# Altium PCB CC2530.PcbDoc
Units mil, origin at the board's own origin, x right, y up, seen from the top; angles counter-clockwise.
Board outline 2950 x 1725 mil, 2 copper layers (Top Layer, Bottom Layer); 28 components, 27 nets, 119 pads, 13 vias.
Unrouted connection lines stored in the file: 1.
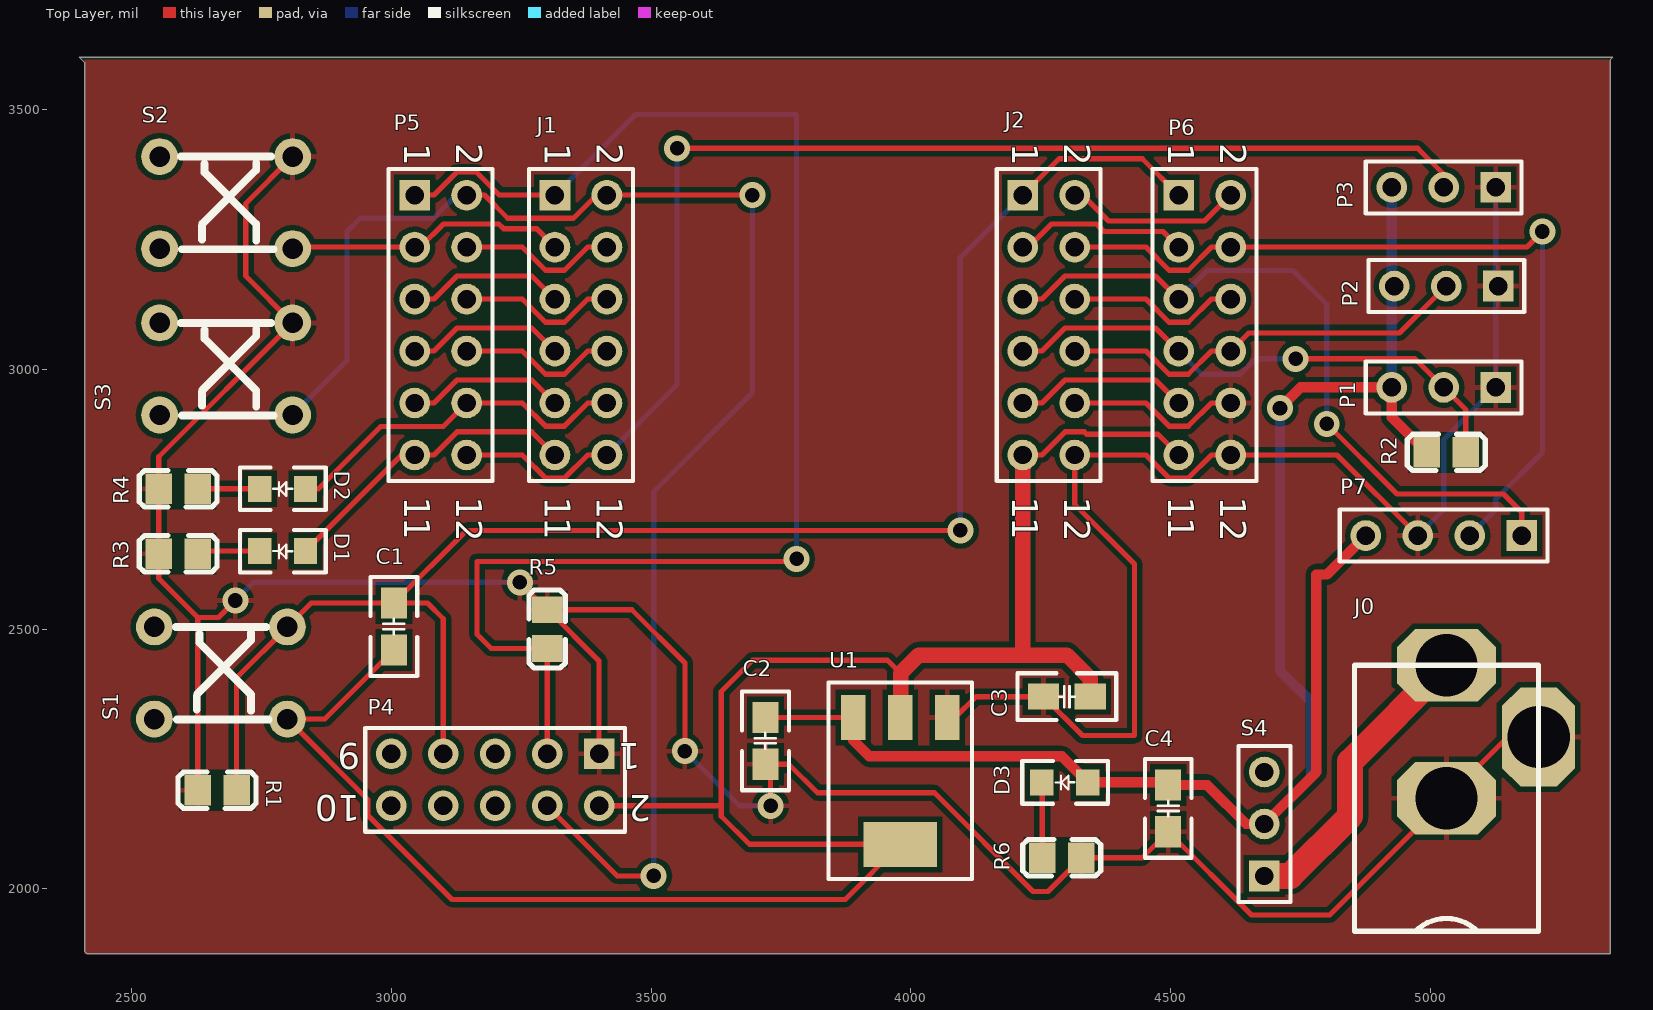
[diagram p0: Top Layer view]
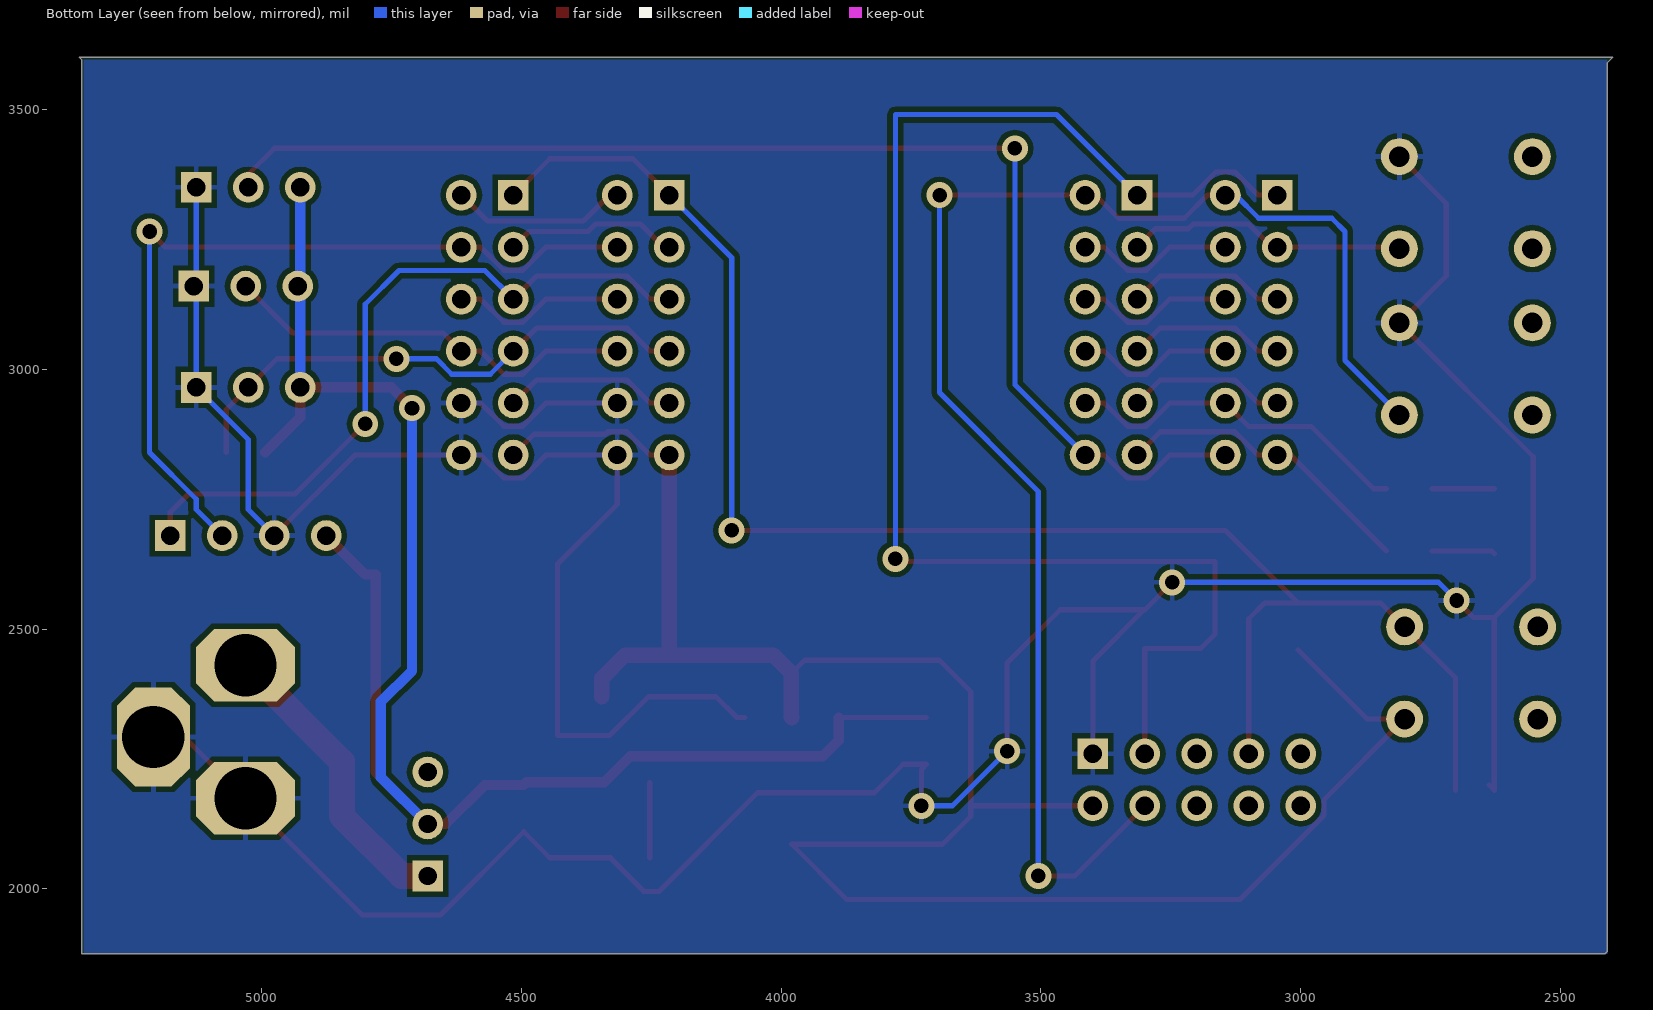
[diagram p1: Bottom Layer view, seen from below]

## Layer stack, top to bottom
Top Layer: signal copper 1.4
Dielectric: dielectric 12.6, FR-4, Dk 4.8
Bottom Layer: signal copper 1.4

## Board outline
2410,3590 2410,1880 2415,1875 5345,1875 5345,3595 5350,3600 2405,3600 2400,3600

## Design rules (kind name [scope] priority, off if disabled: settings)
Clearance [All] p1: gap=10
PolygonConnect [All] p1: connectstyle=Relief reliefconductorwidth=10 reliefentries=4 polygonreliefangle="90 Angle"
RoutingVias [All] p1: holewidth=28 width=50 viastyle="Through Hole" minholewidth=28 minwidth=50 maxholewidth=28 maxwidth=50
SilkscreenOverComponentPads [All] p1: minsilkscreentomaskgap=10
SolderMaskExpansion [All] p1: expansion=4
Width [All] p1: maxlimit=100 minlimit=10 preferedwidth=10
27 further rules are at their usual default settings.

## Components (designator, comment, footprint, x,y, rotation, side; value= is the part's Value field where it differs from the comment)
C1 "Cap" 0805C 3005,2505 r270 top
C2 "Cap" 0805C 3720,2285 r90 top
C3 "Cap" 0805C 4300,2370 r0 top
C4 "Cap" 0805C 4495,2155 r90 top
D1 "LED2" 0805D 2835,2650 r180 top
D2 "LED2" 0805D 2835,2770 r180 top
D3 "LED2" 0805D 4340,2205 r180 top
J0 "POWER_PLUG" POWC 5030,2430 r0 top
J1 "HEARD1" HDR2X6 3315,3335 r270 top
J2 "HEARD2" HDR2X6 4215,3335 r270 top
P1 "18B20" HDR1X3 5125,2965 r180 top
P2 "VOICE READ" HDR1X3 5130,3160 r180 top
P3 "Pyroelectric" HDR1X3 5125,3350 r180 top
P4 "Programming" HDR2X5 3400,2260 r180 top
P5 "HEARD1" HDR2X6 3045,3335 r270 top
P6 "HEARD2" HDR2X6 4515,3335 r270 top
P7 "USB" HDR1X4 5175,2680 r180 top
R1 "Res2" 0805 2665,2190 r0 top
R2 "Res2" 0805 5030,2840 r180 top
R3 "es2" 0805 2590,2645 r0 top
R4 "es2" 0805 2590,2770 r0 top
R5 "Res2" 0805 3300,2500 r90 top
R6 "Res2" 0805 4290,2060 r180 top
S1 "SW-PB" SW-PUSH 2800,2505 r180 top
S2 "SW-PB" SW-PUSH 2810,3410 r180 top
S3 "SW-PB" SW-PUSH 2810,3090 r180 top
S4 "SW-SPST" HDR1X3 4680,2025 r90 top
U1 "AM1117-5v" SOT223 4070,2330 r180 top

## Footprints (in the part's own frame and the unit in brackets; to place one, negate y for a bottom-side part, rotate by r counter-clockwise, add the part's x,y. Pads: shape width x height; smd on the part's side, far side on the other; paste and mask are expansions set on the pad)
0805 [mm] "Chip Resistor; Body 2.0 x 1.3 mm"
  rect 1.3x1.5 smd: 1(-0.95,0) 2(0.95,0)
  silkscreen extent -1.91,-0.89 1.91,0.89
0805C [mil]
  rect 60x50 smd: 1(-45,0) 2(45,0)
  silkscreen extent -95,-45 95,45
0805D [mil]
  rect 45x50 smd: A(0,0) K(88,0)
  silkscreen extent -39,-41 126,41
HDR1X3 [mm] "Connector; Header; 3 Position"
  rect 1.5x1.5 hole 0.9: 1(0,0)
  round 1.5 hole 0.9: 2(2.54,0) 3(5.08,0)
  silkscreen extent -1.27,-1.27 6.35,1.27
HDR1X4 [mm] "Connector; Header; 4 Position"
  rect 1.5x1.5 hole 0.9: 1(0,0)
  round 1.5 hole 0.9: 2(2.54,0) 3(5.08,0) 4(7.62,0)
  silkscreen extent -1.27,-1.27 8.89,1.27
HDR2X5 [mm] "Connector; Header; 5x2 Position"
  rect 1.5x1.5 hole 0.9: 1(0,0)
  round 1.5 hole 0.9: 2(0,2.54) 3(2.54,0) 4(2.54,2.54) 5(5.08,0) 6(5.08,2.54) 7(7.62,0) 8(7.62,2.54) 9(10.16,0) 10(10.16,2.54)
  silkscreen extent -1.27,-1.27 11.43,3.81
HDR2X6 [mm] "Connector; Header; 6x2 Position"
  rect 1.5x1.5 hole 0.9: 1(0,0)
  round 1.5 hole 0.9: 2(0,2.54) 3(2.54,0) 4(2.54,2.54) 5(5.08,0) 6(5.08,2.54) 7(7.62,0) 8(7.62,2.54) 9(10.16,0) 10(10.16,2.54) 11(12.7,0) 12(12.7,2.54)
  silkscreen extent -1.27,-1.27 13.97,3.81
POWC [mil]
  oct 190x140 hole 120: 1(0.35,0.48) 2(0.35,-255.52)
  oct 140x190 hole 120: 3(177.55,-137.52)
  silkscreen extent -177,-512 178,0
SOT223 [mm]
  rect 1.2x2.2 smd: 1(0,0) 2(2.3,0) 3(4.6,0)
  rect 3.6x2.2 smd: 4(2.3,6.2)
  silkscreen extent -1.2,-1.7 5.8,7.9
SW-PUSH [mm]
  round 1.8 hole 1: 1(-0.004,0.022) 2(-0.004,4.522) 3(6.496,0.022) 4(6.496,4.522)
  silkscreen extent 0.92,0.02 5.45,4.55

## Part data
C1 C2 C3 C4: "Capacitor"
D1 D2 D3: "Typical RED, GREEN, YELLOW, AMBER"
J1 J2 P5 P6: library part MHDR2X6, "Header, 6-Pin, Dual row"
P1: library part "Header 3H", "Header, 3-Pin, Right Angle"
P2 P3: library part "Header 3", "Header, 3-Pin"
P4: library part "Header 5X2", "Header, 5-Pin, Dual row"
P7: library part "Header 4", "Header, 4-Pin"
R1 R2 R5 R6: "Resistor"
R3 R4: library part Res2, "Resistor"
S4: "Single-Pole, Single-Throw Switch"

## Via types
v1: diameter 50, hole 28, Top Layer to Bottom Layer, 13 vias

## Nets (pads, with @x,y where several pads share a name; then routed paths per layer and width w, separated by ;. In a path a pad name is that pad's centre, name@x,y a point inside that pad or via, vN(x,y) a via of type N, cw(c..) or ccw(c..) an arc to the next point about the centre after c; other vN are vias at no path point)
GND: C2.1 C3.1 C4.1 J0.2 J0.3 J2.10 J2.12 P1.1 P2.1 P3.1 P4.1 P6.10 P6.12 P7.3 R1.1 R3.1 R4.1 R5.2 R6.1 S2.1 S3.1 U1.1 | length 7989.6
  Top Layer w10: R1.1@2637.4,2199.8 R1.1 2627.6,2522.4 ; v1(2700,2555) 2667.4,2522.4 2627.6,2522.4 ; S2.1 2720,3318.96 2720,3179.29 S3.1 2552.6,2831.56 R4.1 R3.1 2552.6,2597.4 2627.6,2522.4 ; v1(3247.4,2590) R5.2 R5.2@3301.53,2537.4 ; P4.1 3400,2438.93 R5.2@3301.53,2537.4 ; v1(3565,2265) 3565,2435 3462.6,2537.4 R5.2@3301.53,2537.4 ; v1(3730,2160) 3730,2230 C2.1 3765,2240 3820,2185 4045,2185 4235,1995 4263.93,1995 4327.4,2058.47 R6.1 4445,2060 C4.1 4655,1950 4805.87,1950 J0.2 5148.35,2292.48 J0.3 ; U1.1 4085,2330 4125,2370 C3.1 4330,2295 4430,2295 4430,2625 4315,2740 J2.12 4452.03,2835 4496.56,2790.47 4533.44,2790.47 4577.97,2835 P6.12 4820,2835 P7.3 ; J2.10 4452.03,2935 4496.56,2890.47 4533.44,2890.47 4577.97,2935 P6.10 ; J0.3@5178.35,2217.48 5237.55,2217.48 J0.3@5240.03,2215
  Bottom Layer w10: v1(2700,2555) 2735,2590 v1(3247.4,2590) ; v1(3565,2265) 3670,2160 v1(3730,2160) ; P7.3 5025,2730 5025,2865 P1.1 P3.1
NetD1_K: D1.K R3.2 | length 121.7
  Top Layer w10: R3.2 2632.4,2650 D1.K
NetD2_K: D2.K R4.2 | length 119.6
  Top Layer w10: R4.2 D2.K
NetD3_K: D3.K R6.2 | length 144.4
  Top Layer w10: R6.2 D3.K@4252.6,2204.4
P00: J2.2 P6.2 | length 341.4
  Top Layer w10: J2.2 4330,3335 4380,3285 4565,3285 P6.2
P01: J2.3 P6.3 | length 336.9
  Top Layer w10: J2.3 4225.94,3235 4270.47,3279.53 4357.19,3279.53 4371.72,3265 4485,3265 P6.3
P02: J2.4 P6.4 P7.2 | length 1592.3
  Top Layer w10: J2.4 4452.03,3235 4496.56,3190.47 4533.44,3190.47 4577.97,3235 P6.4 5185,3235 v1(5215,3265)
  Bottom Layer w10: P7.2 5125,2730 5125,2750 5215,2840 v1(5215,3265)
P03: J2.5 P6.5 P7.1 | length 1392
  Top Layer w10: J2.5 4252.03,3135 4296.56,3179.53 4470.47,3179.53 P6.5 ; v1(4800,2895) 4935,2760 5140,2760 5175,2725 P7.1
  Bottom Layer w10: P6.5 4570,3190 4735,3190 4800,3125 v1(4800,2895)
P04: J2.6 P6.6 | length 336.9
  Top Layer w10: J2.6 4452.03,3135 4496.56,3090.47 4533.44,3090.47 4577.97,3135 P6.6
P05: J2.7 P1.2 P6.7 R2.1 | length 1042.9
  Top Layer w10: J2.7 4252.03,3035 4296.56,3079.53 4470.47,3079.53 P6.7 ; v1(4740,3020) 4970,3020 P1.2 5067.4,2922.6 R2.1
  Bottom Layer w10: P6.7 4559.53,2990.47 4633.44,2990.47 4662.97,3020 v1(4740,3020)
P06: J2.8 P2.2 P6.8 | length 803.7
  Top Layer w10: J2.8 4452.03,3035 4496.56,2990.47 4533.44,2990.47 4577.97,3035 P6.8 4650,3070 4940,3070 P2.2
P07: J1.12 P3.2 P5.12 | length 2473.5
  Top Layer w10: P5.12 3252.03,2835 3296.56,2790.47 3333.44,2790.47 3377.97,2835 J1.12 ; v1(3550,3425) 4975,3425 5025,3375 P3.2
  Bottom Layer w10: J1.12 3550,2970 v1(3550,3425)
P10: D1.A J1.11 P5.11 | length 593.5
  Top Layer w10: D1.A 3020,2835 P5.11 3082.03,2835 3126.56,2879.53 3270.47,2879.53 J1.11
P11: D2.A J1.10 P5.10 | length 685.2
  Top Layer w10: D2.A 2860,2770 2980,2890 3100,2890 P5.10 3252.03,2935 3296.56,2890.47 3333.44,2890.47 3377.97,2935 J1.10
P12: J1.9 P5.9 | length 306.9
  Top Layer w10: P5.9 3082.03,2935 3126.56,2979.53 3270.47,2979.53 J1.9
P13: J1.8 P5.8 | length 306.9
  Top Layer w10: P5.8 3252.03,3035 3296.56,2990.47 3333.44,2990.47 3377.97,3035 J1.8
P14: J1.7 P5.7 | length 306.9
  Top Layer w10: P5.7 3082.03,3035 3126.56,3079.53 3270.47,3079.53 J1.7
P15: J1.6 P5.6 | length 306.9
  Top Layer w10: P5.6 3252.03,3135 3296.56,3090.47 3333.44,3090.47 3377.97,3135 J1.6
P16: J1.5 P5.5 | length 306.9
  Top Layer w10: P5.5 3082.03,3135 3126.56,3179.53 3270.47,3179.53 J1.5
P17: J1.4 P5.4 | length 306.9
  Top Layer w10: P5.4 3252.03,3235 3296.56,3190.47 3333.44,3190.47 3377.97,3235 J1.4
P20: J1.3 P5.3 S2.2 | length 543
  Top Layer w10: S2.2 2813.21,3235 P5.3 3055.94,3235 3100.47,3279.53 3206.88,3279.53 3215.93,3270.47 3279.53,3270.47 J1.3
P21: J1.2 P4.4 P5.2 S3.2 | length 2892
  Top Layer w10: P5.2 3179.69,3335 3224.21,3290.47 3350.74,3290.47 3395.27,3335 J1.2 v1(3695,3335) ; P4.4 3435,2025 v1(3505,2025)
  Bottom Layer w10: S3.2 2915,3016.79 2915,3265 2940.47,3290.47 3080.74,3290.47 3125.27,3335 P5.2 ; v1(3505,2025) 3505,2765 3695,2955 v1(3695,3335)
P22: J1.1 P4.3 P5.1 R5.1 | length 2797.1
  Top Layer w10: P5.1 3082.03,3335 3126.56,3379.53 3163.44,3379.53 3207.97,3335 J1.1 ; P4.3 R5.1 3192.4,2462.6 3165,2490 3165,2630 3775,2630 v1(3780,2635)
  Bottom Layer w10: J1.1 3470,3490 3780,3490 v1(3780,2635)
RST: C1.1 J2.1 P4.7 P6.1 R1.2 S1.1 | length 3146.6
  Top Layer w10: R1.2 2702.4,2406.36 S1.1 2846.04,2550 C1.1 ; P4.7 3100,2520 3070,2550 C1.1 ; v1(4095,2690) 3145,2690 C1.1 ; J2.1 4285,3405 4445,3405 P6.1
  Bottom Layer w10: v1(4095,2690) 4095,3215 J2.1
"VCC 3.3V": C1.2 C3.2 J2.9 J2.11 P4.2 P6.9 P6.11 S1.2 U1.2 U1.4 | length 4445.7
  Top Layer w10: C1.2 2871.96,2326.96 S1.2 2955.47,2171.65 2955.47,2141.56 3117.03,1980 3873.54,1980 U1.4 3689.09,2085.91 3635,2140 3635,2155 ; P4.2 3630,2160 3635,2155 ; 3980,2415 3955,2440 3695,2440 3635,2380 3635,2155 ; J2.11 4252.03,2835 4296.56,2879.53 4333.44,2879.53 4337.97,2875 4475,2875 P6.11 ; J2.9 4252.03,2935 4296.56,2979.53 4470.47,2979.53 P6.9
  Top Layer w30: U1.2 3980,2330.55 3980,2415 4015,2450 4215,2450 ; J2.11 4215,2450 ; C3.2 4345,2405 4300,2450 4215,2450
"VCC 5V": C2.2 C4.2 D3.A P1.3 P2.3 P3.3 P7.4 R2.2 S4.2 U1.3 | length 3349.8
  Top Layer w10: C2.2 U1.3 ; C4.2@4490,2205 C4.2 ; S4.2@4655,2125 S4.2
  Top Layer w20: U1.3 3888.9,2286.1 3920,2255 4290,2255 D3.A C4.2@4490,2205 ; C4.2 4570,2200 4645,2125 S4.2@4655,2125 ; S4.2 4780,2225 4780,2605 4800,2605 P7.4 ; v1(4710,2925) 4750,2965 P1.3 4925,2907.6 R2.2
  Bottom Layer w20: S4.2 4770,2215 4770,2360 4710,2420 v1(4710,2925) ; P1.3 P3.3
"VCC IN": J0.1 S4.1 | length 579.8
  Top Layer w50: S4.1 4729.87,2025 4845,2140.13 4845,2245.13 J0.1
pads on no net: P4.5 P4.6 P4.8 P4.9 P4.10 S1.3 S1.4 S2.3 S2.4 S3.3 S3.4 S4.3

## Polygon pours and split planes (outlines as drawn)
GND on Top Layer "Top Layer-No Net" (solid, pour order 6): 2410,3595 2410,1875 5345,1875 5345,3600 5340,3595 2410,3595
GND on Bottom Layer "Top Layer-No Net" (solid, pour order 8): 2410,3593.47 2410,1875 5345,1875 5341.3,1878.7 5341.3,3595 2410,3595

## Text inside footprints (layer, text, board x,y; h text height)
J1: Top Overlay "2" at 3395,3435 h50 r270; Top Overlay "1" at 3295,3435 h50 r270; Top Overlay "1" at 3295,2755 h50 r270; Top Overlay "1" at 3295,2715 h50 r270; Top Overlay "12" at 3395,2755 h50 r270
J2: Top Overlay "2" at 4295,3435 h50 r270; Top Overlay "1" at 4195,3435 h50 r270; Top Overlay "1" at 4195,2755 h50 r270; Top Overlay "1" at 4195,2715 h50 r270; Top Overlay "12" at 4295,2755 h50 r270
P4: Top Overlay "2" at 3500,2180 h50 r180; Top Overlay "1" at 3480,2280 h50 r180; Top Overlay "9" at 2940,2280 h50 r180; Top Overlay "10" at 2940,2180 h50 r180
P5: Top Overlay "2" at 3125,3435 h50 r270; Top Overlay "1" at 3025,3435 h50 r270; Top Overlay "1" at 3025,2755 h50 r270; Top Overlay "1" at 3025,2715 h50 r270; Top Overlay "12" at 3125,2755 h50 r270
P6: Top Overlay "2" at 4595,3435 h50 r270; Top Overlay "1" at 4495,3435 h50 r270; Top Overlay "1" at 4495,2755 h50 r270; Top Overlay "1" at 4495,2715 h50 r270; Top Overlay "12" at 4595,2755 h50 r270